# Altium PCB RDA5807_89C52.PcbDoc
Units mil, origin at the board's own origin, x right, y up, seen from the top; angles counter-clockwise.
Board outline 3937.01 x 3937.01 mil, 2 copper layers (Top Layer, Bottom Layer); 36 components, 32 nets, 157 pads, 16 vias.
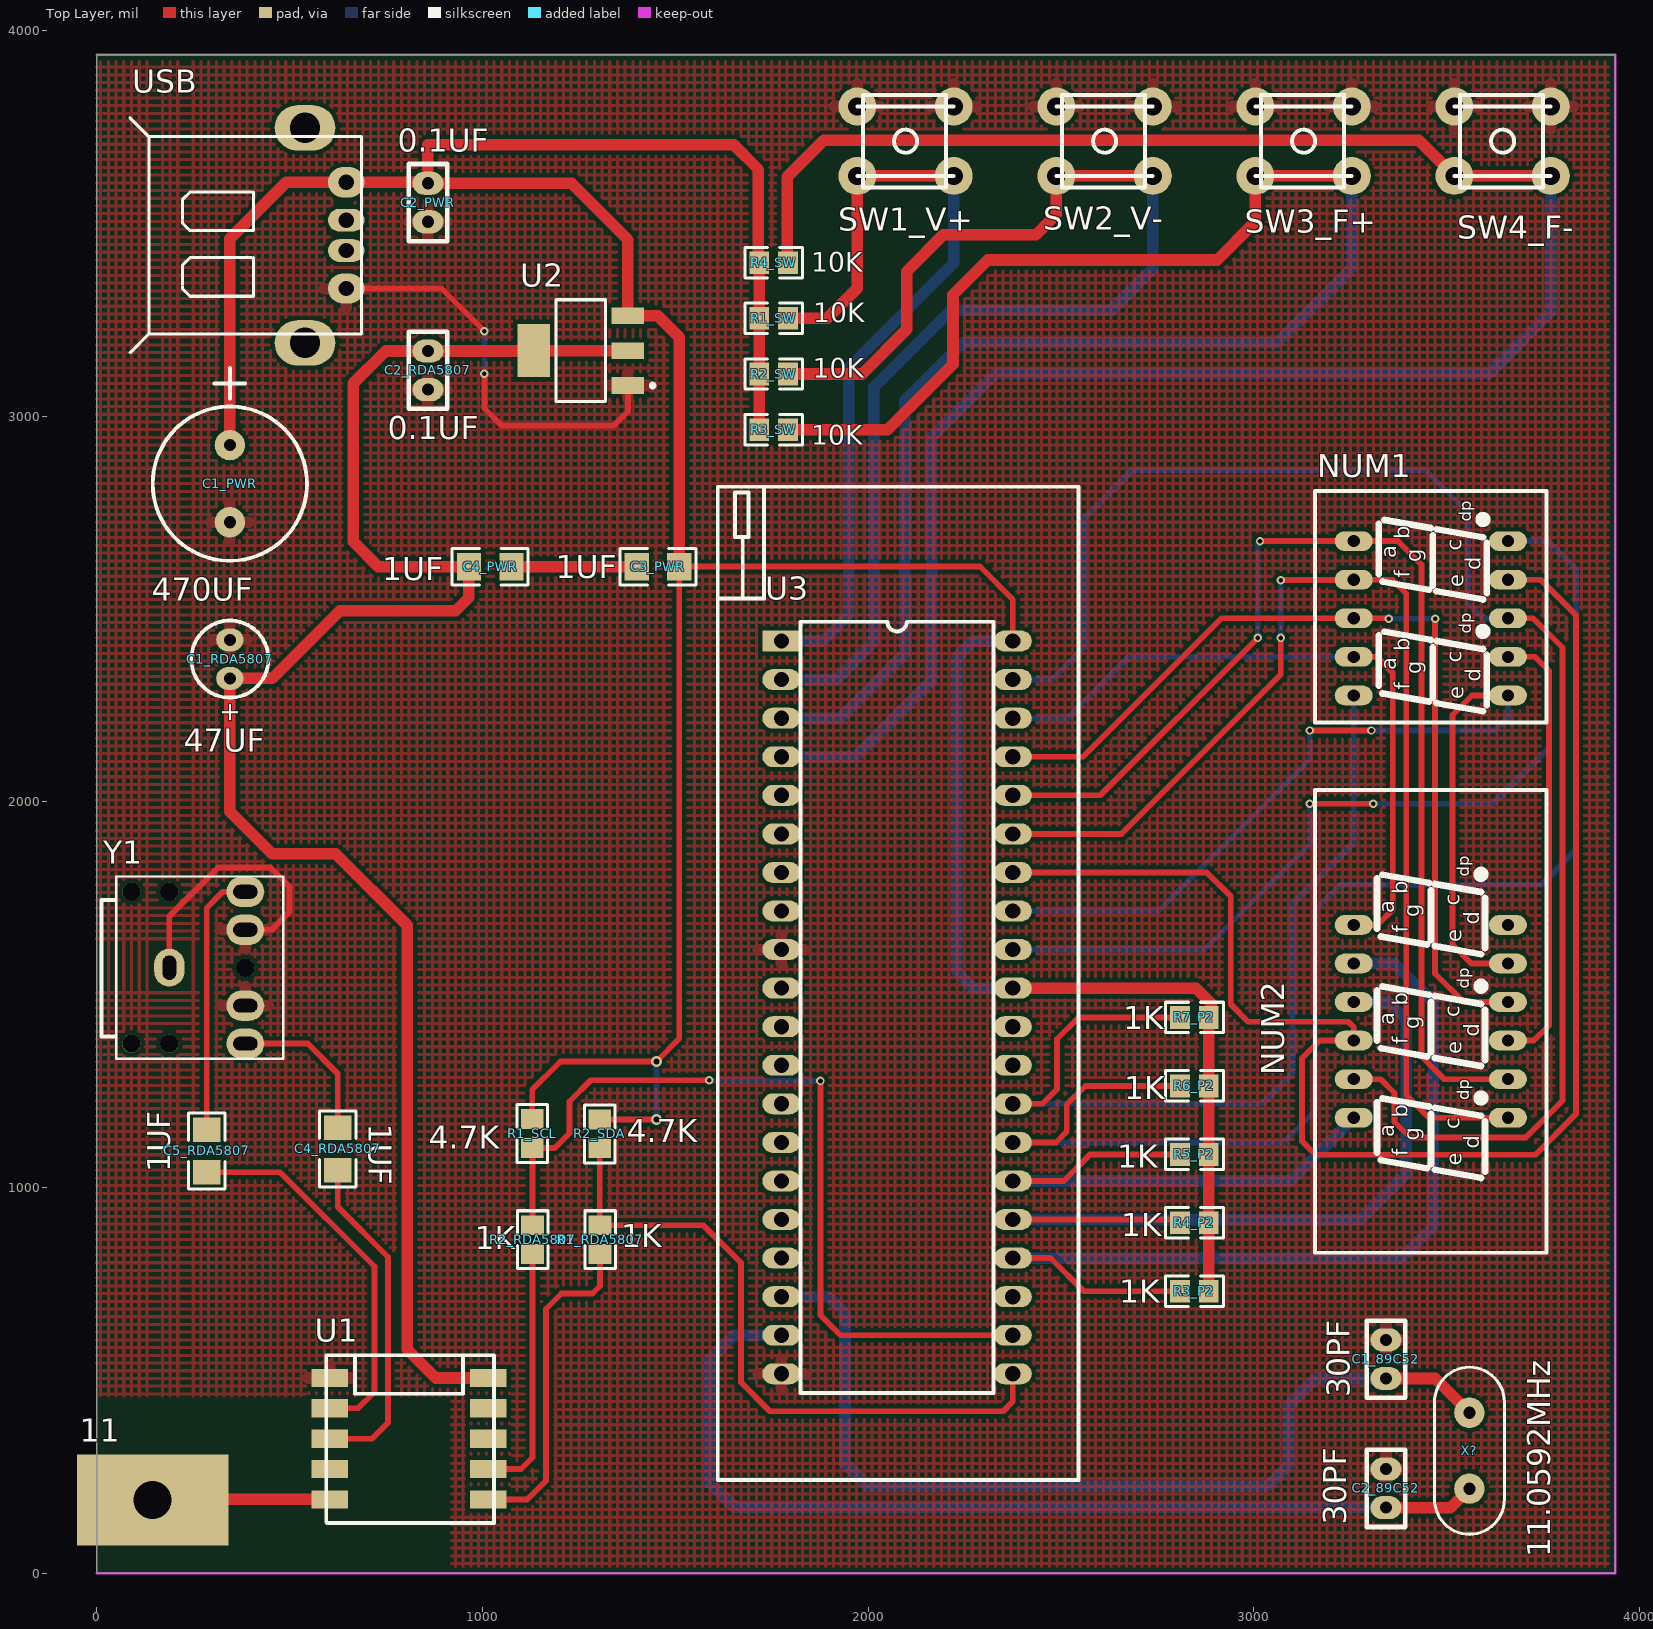
[diagram p0: Top Layer view]
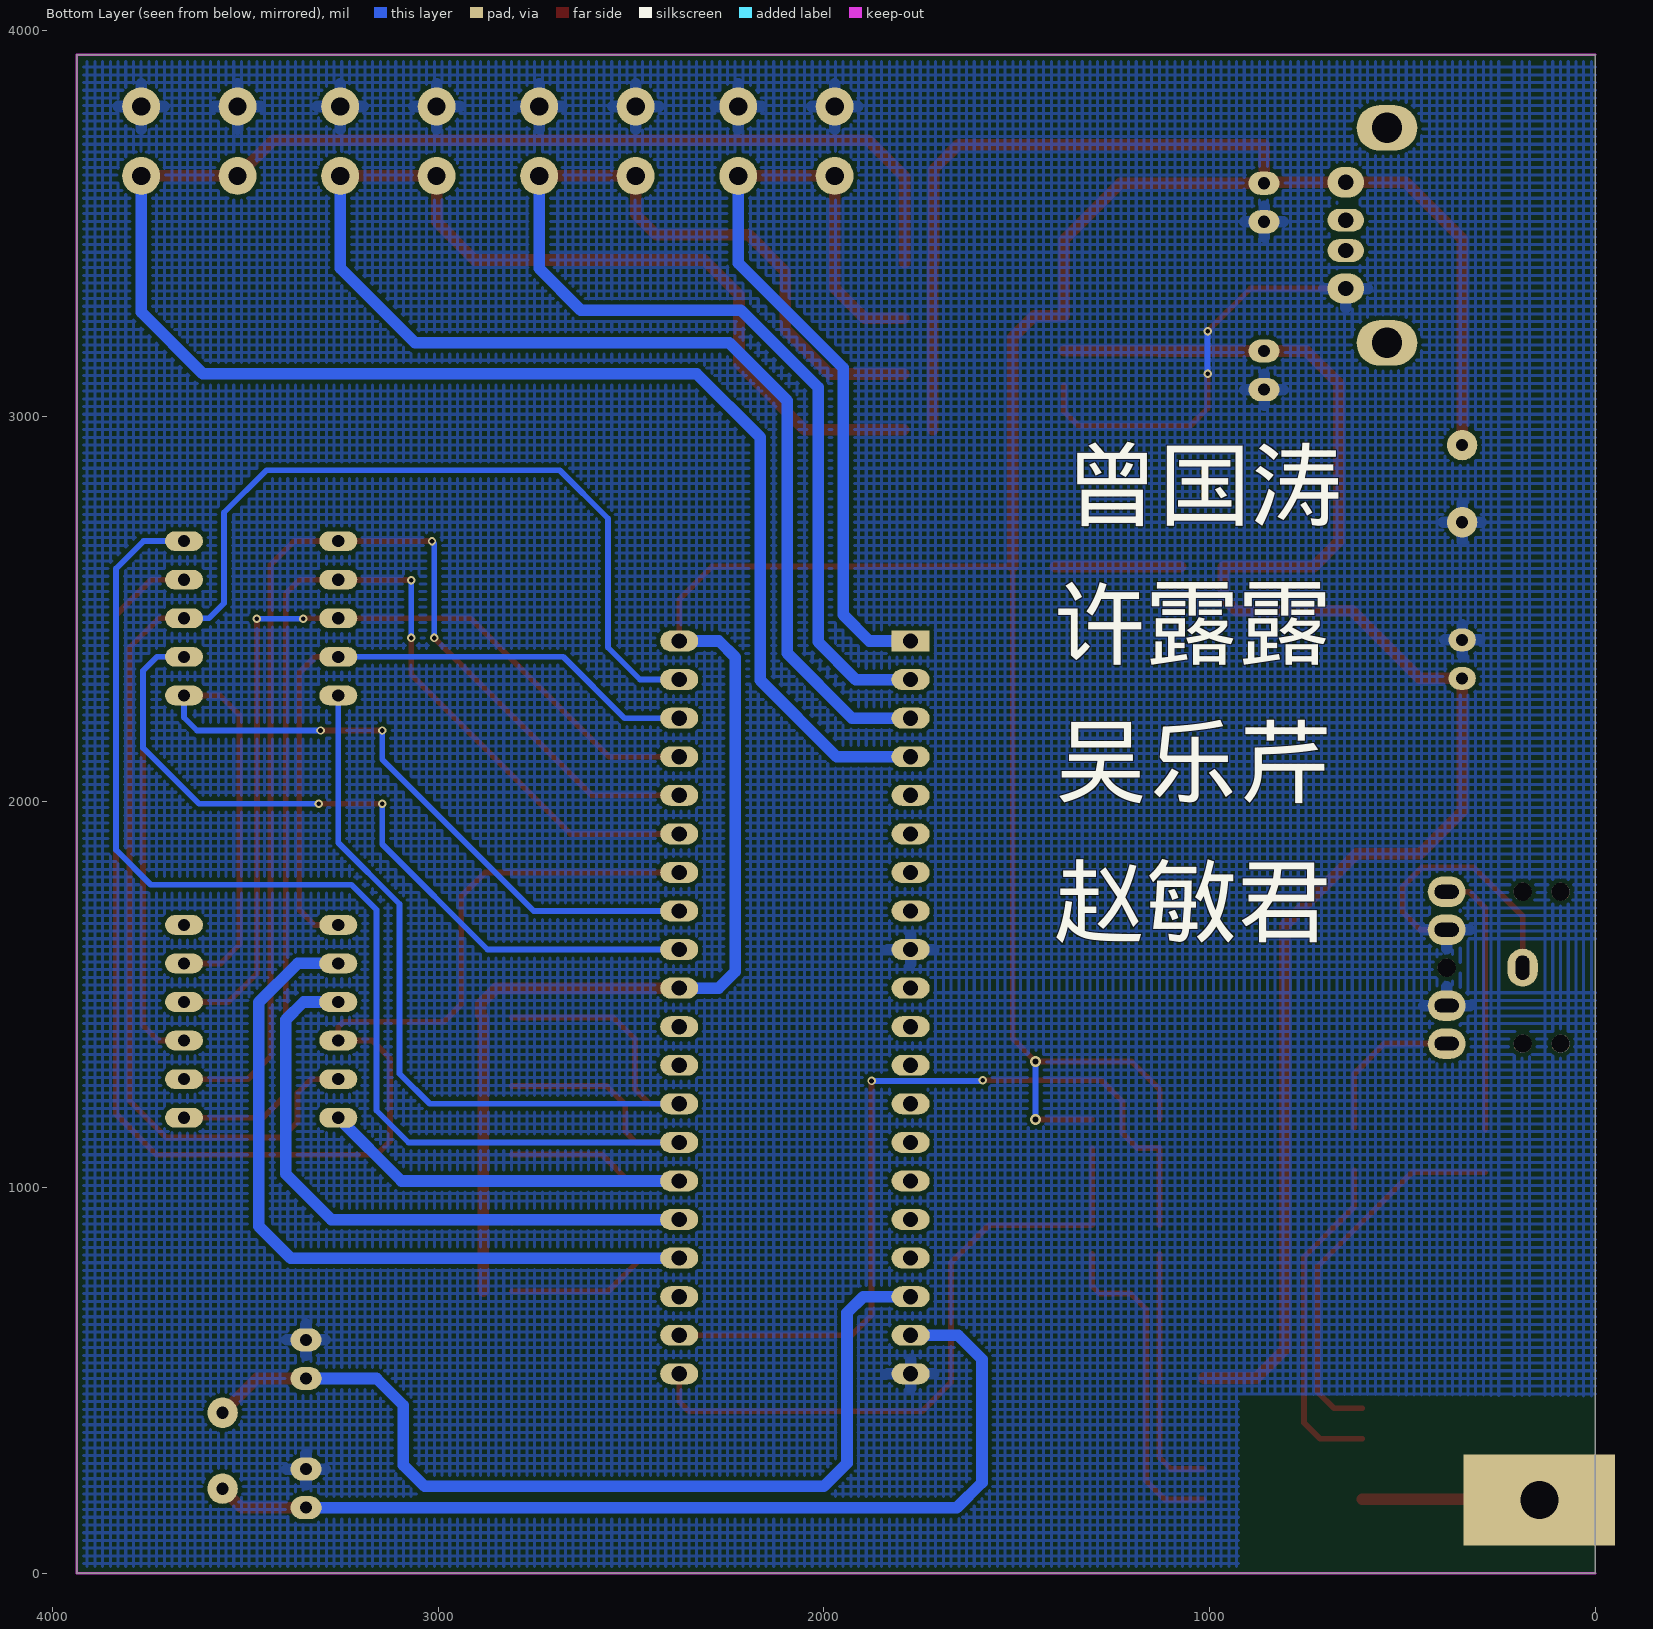
[diagram p1: Bottom Layer view, seen from below]
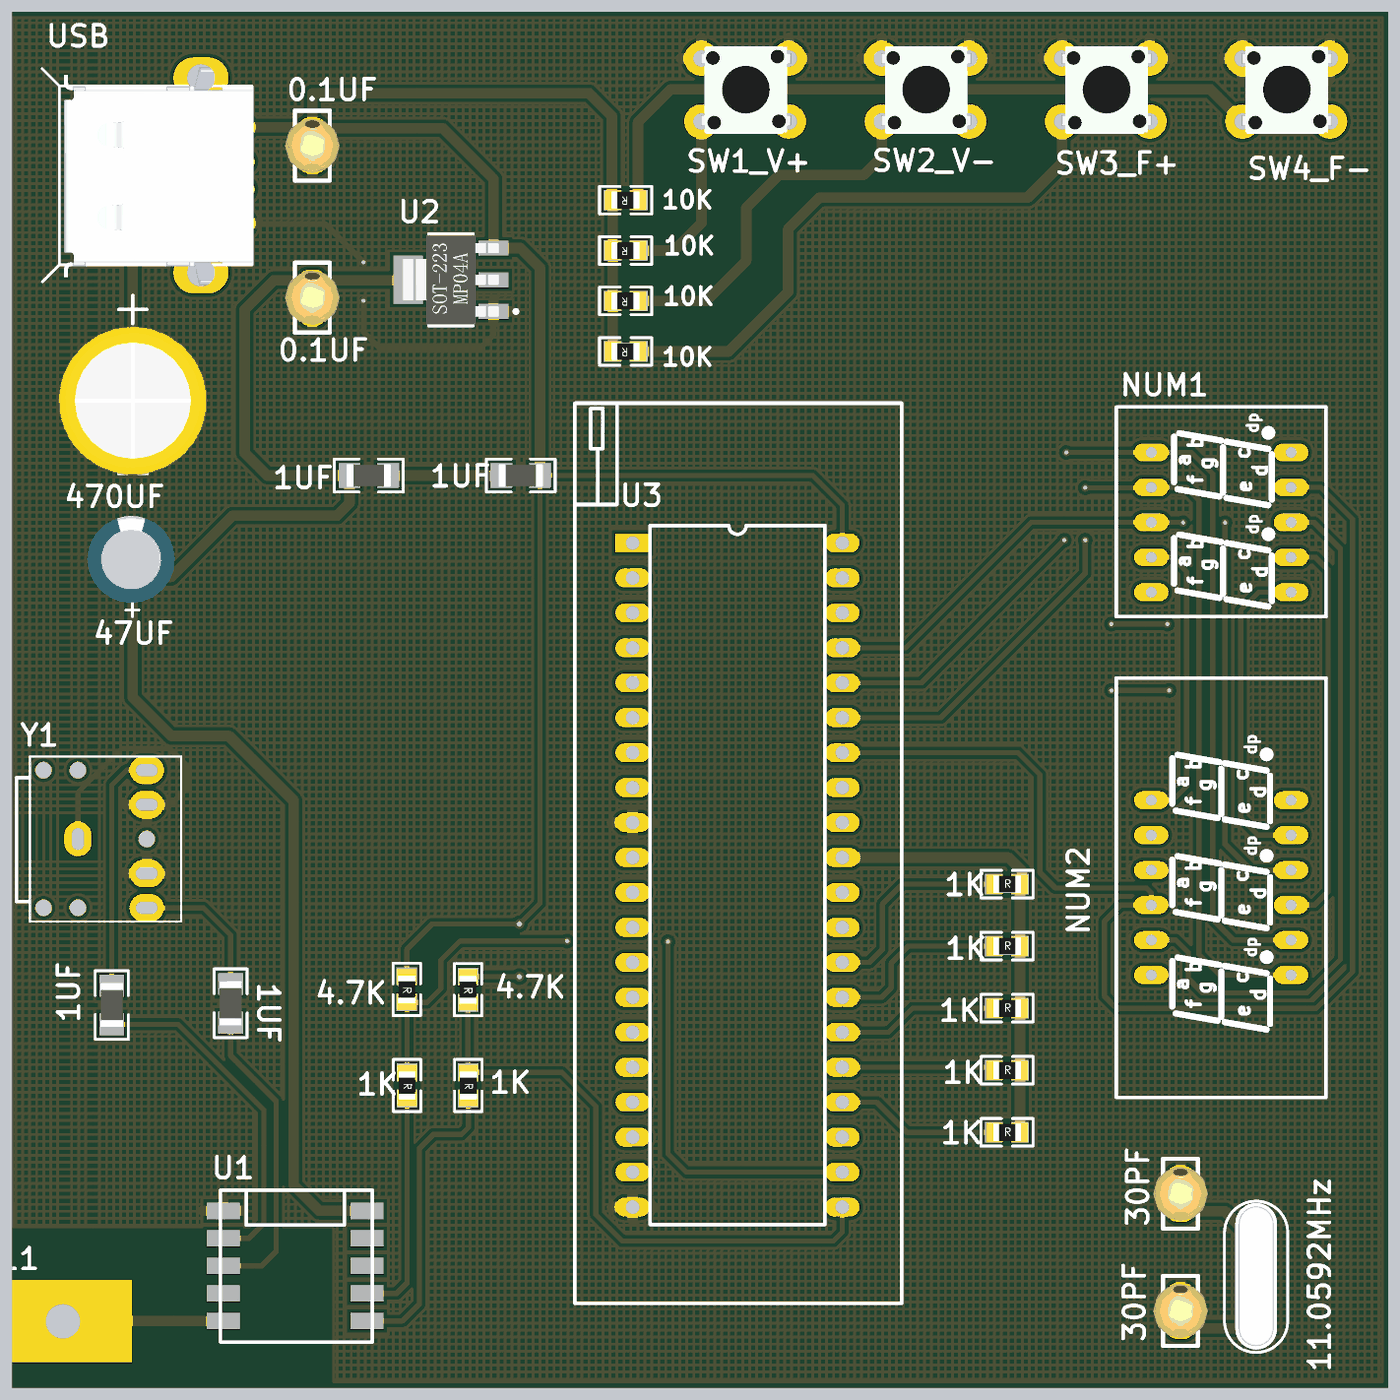
[diagram p2: 3D render of the assembled board from above, using the file's embedded part models]

## Layer stack, top to bottom
Top Solder: solder mask 0.4, Solder Resist, Dk 3.5
Top Layer: signal copper 1.4
Dielectric 1: dielectric 12.6, FR-4, Dk 4.8
Bottom Layer: signal copper 1.4
Bottom Solder: solder mask 0.4, Solder Resist, Dk 3.5

## Board outline
0,0 3937.01,0 3937.01,3937.01 0,3937.01

## Design rules (kind name [scope] priority, off if disabled: settings)
Clearance [(IsTrack) vs (IsTrack)] p1 off: gap=12
Clearance POLY [InPolygon] p2: gap=10
Clearance VIA-POLY [ISVIA vs InPolygon] p3: gap=6
Clearance all [All] p4: gap=6
DiffPairsRouting DiffPair_90DiffPairsRouting [InDifferentialPairClass('90OM')] p1: maxlimit=7 minlimit=7 mostfreqgap=7 toplayer_minwidth=6 toplayer_maxwidth=6 toplayer_prefwidth=6 bottomlayer_minwidth=6 bottomlayer_maxwidth=6 bottomlayer_prefwidth=6 maxuncoupledlength=500
MatchedLengths DiffPair_90MatchedLengths [InDifferentialPair ('D_D')] p1: tolerance=1000 checknetsindiffpair=FALSE checkdiffpairvsdiffpair=TRUE checkxsignals=TRUE checkothers=TRUE
PolygonConnect PolygonConnect_1 [ISVIA] p1: connectstyle=Direct reliefconductorwidth=10 reliefentries=4 polygonreliefangle="90 Angle" airgapwidth=10
PolygonConnect [All] p2: connectstyle=Relief reliefconductorwidth=30 reliefentries=4 polygonreliefangle="90 Angle" airgapwidth=10
RoutingVias [All] p1: holewidth=15 width=28 viastyle="Through Hole" minholewidth=12 minwidth=22 maxholewidth=15 maxwidth=28
SilkToSilkClearance [All] p1: silktosilkclearance=2
SilkToSolderMaskClearance [IsPad] p1: minsilkscreentomaskgap=2 clearancetoexposedcopper=TRUE
SolderMaskExpansion [All] p1: expansion=2.5
Width PWR [InNetClass('PWR')] p1: maxlimit=60 minlimit=6 preferedwidth=30
Width [All] p2: maxlimit=45 minlimit=6 preferedwidth=15
27 further rules are at their usual default settings.

## Classes and differential pairs
net class GND: GND
net class PWR: 3.3V 5V
component class RDA5807_89C52: 11 C1_89C52 C1_PWR C1_RDA5807 C2_89C52 C2_PWR C2_RDA5807 C3_PWR C4_PWR C4_RDA5807 C5_RDA5807 NUM1 NUM2 R1_RDA5807 R1_SCL R1_SW R2_RDA5807 R2_SDA R2_SW R3_P2 R3_SW R4_P2 R4_SW R5_P2 R6_P2 R7_P2 SW1_V+ SW2_V- SW3_F+ SW4_F- U1 U2 USB X?

## Components (designator, comment, footprint, x,y, rotation, side; value= is the part's Value field where it differs from the comment)
11 "天线贴片" 天线贴孔 145,190 r0 top
C1_89C52 "30PF" RAD-0.1 3344,556 r90 top
C1_PWR "470UF" RB.2/.4 345,2725 r90 top
C1_RDA5807 "47UF" RB.1/.2 345,2420 r270 top
C2_89C52 "30PF" RAD-0.1 3344,221 r90 top
C2_PWR "0.1UF" RAD-0.1 860,3555 r90 top
C2_RDA5807 "0.1UF" RAD-0.1 860,3120 r90 top
C3_PWR "1UF" 1206 1455,2610 r180 top
C4_PWR "1UF" 1206 1020,2610 r0 top
C4_RDA5807 "1UF" 1206 625,1100 r270 top
C5_RDA5807 "1UF" 1206 285,1095 r270 top
NUM1 "LEDNUM_2位7段数码管共阳极" LEDNUM_2位7段数码管 3259,2276 r90 top
NUM2 "频率" LEDNUM_3位7段数码管 3259,1181 r90 top
R1_RDA5807 "1K" "0805 RES" 1305,865 r270 top
R1_SCL "4.7K" "0805 RES" 1129,1140 r270 top
R1_SW "10K" "0805 RES" 1755,3253.67 r180 top
R2_RDA5807 "1K" "0805 RES" 1130,865 r270 top
R2_SDA "4.7K" "0805 RES" 1304,1139 r270 top
R2_SW "10K" "0805 RES" 1755,3109.33 r180 top
R3_P2 "1K" "0805 RES" 2846,731 r0 top
R3_SW "10K" "0805 RES" 1755,2965 r180 top
R4_P2 "1K" "0805 RES" 2846,908.5 r0 top
R4_SW "10K" "0805 RES" 1755,3398 r180 top
R5_P2 "1K" "0805 RES" 2846,1086 r0 top
R6_P2 "1K" "0805 RES" 2846,1263.5 r0 top
R7_P2 "1K" "0805 RES" 2846,1441 r0 top
SW1_V+ "6*6" 6*6按键开关 2222,3803 r270 top
SW2_V- "6*6_4脚按键开关" 6*6按键开关 2738,3803 r270 top
SW3_F+ "6*6_4脚按键开关" 6*6按键开关 3254,3803 r270 top
SW4_F- "6*6_4脚按键开关" 6*6按键开关 3770,3803 r270 top
U1 "RDA5807模块" RDA5807模块 1029.96,565.28 r180 top
U2 "AMS1117" SOT223 1255,3170 r90 top
U3 "STC89C52_Plug" ZIF40 1775,2417 r0 top
USB "USB母口" USB-A 646.69,3606.54 r180 top
X? "11.0592MHz" XTAL1 3559,219.15 r90 top
Y1 "音频插座" 耳机插座 483.43,1806.22 r180 top

## Footprints (in the part's own frame and the unit in brackets; to place one, negate y for a bottom-side part, rotate by r counter-clockwise, add the part's x,y. Pads: shape width x height; smd on the part's side, far side on the other; paste and mask are expansions set on the pad)
6*6按键开关 [mm]
  round 2.5 hole 1.2: 1(0,0) 1(0,-6.35) 2(4.572,0) 2(4.572,-6.35)
  silkscreen extent -0.76,-6.35 5.33,0, body extent -0.84,-6.4 5.36,0.15, height 5
"0805 RES" [mm]
  rect 1.3x1.5 smd: 1(-0.95,0) 2(0.95,0)
  silkscreen extent -1.9,-1 1.9,1, body extent -1.49,-0.7 1.51,0.7, height 0.53
1206 [mm]
  rect 1.6x1.8 smd: 1(-1.4,0) 2(1.4,0)
  silkscreen extent -2.5,-1.2 2.5,1.2, body extent -1.6,-0.81 1.6,0.81, height 0.61
LEDNUM_2位7段数码管 [mm]
  oval 1.3x2.5 hole 0.8: 1(0,-10.16) 2(2.54,-10.16) 3(5.08,-10.16) 4(7.62,-10.16) 5(10.16,-10.16) 6(10.16,0) 7(7.62,0) 8(5.08,0) 9(2.54,0) 10(0,0)
  silkscreen extent -1.78,-12.7 13.46,2.54
LEDNUM_3位7段数码管 [mm]
  oval 1.3x2.5 hole 0.8: 1(0,-10.16) 2(2.54,-10.16) 3(5.08,-10.16) 4(7.62,-10.16) 5(10.16,-10.16) 6(12.7,-10.16) 7(12.7,0) 8(10.16,0) 9(7.62,0) 10(5.08,0) 11(2.54,0) 12(0,0)
  silkscreen extent -8.89,-12.7 21.59,2.54
RAD-0.1 [mil]
  oval 60x80 hole 31.5: 1(-51.06,1.38) 2(48.94,1.38)
  silkscreen extent -101,-49 99,51, body extent -79,-77 77,80, height 291
RB.1/.2 [mm]
  oval 1.5x1.8 hole 0.8: 1(2.54,0) 2(0,0)
  silkscreen extent -1.27,-2.54 3.81,2.54, body extent -1.88,-3.26 4.42,3.04, height 11.5
RB.2/.4 [mm]
  round 2 hole 0.8: 1(5.08,0) 2(0,0)
  silkscreen extent -2.54,-5.08 10.16,5.08, body extent -2.89,-5.41 7.92,5.39, height 13
RDA5807模块 [mm]
  rect 2.4x1.2 smd mask+0.051: 1(10.82,1.5) 2(10.82,3.5) 3(10.82,5.5) 4(10.82,7.5) 5(10.82,9.5) 6(0.38,9.5) 7(0.38,7.5) 8(0.38,5.5) 9(0.38,3.5) 10(0.38,1.5)
  silkscreen extent 0,0 11.05,11.05
SOT223 [mm]
  rect 1.1x2.15 smd: 1(-2.3,-3.1) 2(0,-3.1) 3(2.3,-3.1)
  rect 3.5x2.15 smd: 2(0,3.1)
  silkscreen extent -3.35,-4.85 3.35,1.63, body extent -3.25,-3.48 3.25,3.48, height 1.7
USB-A [mm]
  oval 4x3 hole 2: 0(2.71,10.58) 0(2.71,-3.58)
  oval 2.4x2 hole 1: 1(0,0) 4(0,7)
  oval 2.4x1.5 hole 1: 2(0,2.5) 3(0,4.5)
  silkscreen extent -1,-4.25 14.25,11.23, body extent -1.04,-4.34 12.66,11.46, height 6.95
XTAL1 [mm]
  round 2 hole 0.8: 1(0,0) 2(5,0)
  silkscreen extent -3,-2.3 8,2.3, body extent -2.79,-1.52 7.87,1.52, height 3.09
ZIF40 [mm]
  rect 2.5x1.38 hole 1: 1(0,0)
  oval 2.5x1.38 hole 1: 2(0,-2.54) 3(0,-5.08) 4(0,-7.62) 5(0,-10.16) 6(0,-12.7) 7(0,-15.24) 8(0,-17.78) 9(0,-20.32) 10(0,-22.86) 11(0,-25.4) 12(0,-27.94) 13(0,-30.48) 14(0,-33.02) 15(0,-35.56) 16(0,-38.1) 17(0,-40.64) 18(0,-43.18) 19(0,-45.72) 20(0,-48.26) 21(15.24,-48.26) 22(15.24,-45.72) 23(15.24,-43.18) 24(15.24,-40.64) 25(15.24,-38.1) 26(15.24,-35.56) 27(15.24,-33.02) 28(15.24,-30.48) 29(15.24,-27.94) 30(15.24,-25.4) 31(15.24,-22.86) 32(15.24,-20.32) 33(15.24,-17.78) 34(15.24,-15.24) 35(15.24,-12.7) 36(15.24,-10.16) 37(15.24,-7.62) 38(15.24,-5.08) 39(15.24,-2.54) 40(15.24,0)
  silkscreen extent -4.19,-55.24 19.56,10.16
天线贴孔 [mm]
  rect 10x6 hole 2.5: 1(0,0)
耳机插座 [mm]
  round 1.2 hole 1.2: 0(2.5,6) 0(7.5,11) 0(7.5,1) 0(10,11) 0(10,1)
  oval 2x2.5 hole 1.6 slot 0.9 at 0 deg: 1(7.5,6)
  oval 2.5x2 hole 0.9 slot 1.6 at 0 deg: 2(2.5,1) 3(2.5,3.5) 4(2.5,8.5) 5(2.5,11)
  silkscreen extent 0,0 11.98,12

## Part data
C1_89C52 C2_89C52 C2_PWR C2_RDA5807: library part CAP_直插式电容_2.54
C1_PWR C1_RDA5807: library part CAP_直插式极性电容
C3_PWR C4_PWR C4_RDA5807 C5_RDA5807: library part CAP_1206贴片电容
NUM2: library part LEDNUM_3位7段数码管共阳极_5361
R1_RDA5807 R1_SCL R1_SW R2_RDA5807 R2_SDA R2_SW R3_P2 R3_SW R4_P2 R4_SW R5_P2 R6_P2 R7_P2: library part RES_贴片式电阻
SW1_V+: library part 6*6_4脚按键开关
U2: library part 贴片芯片_AMS1117_SOT223
U3: library part 直插芯片_STC89C52
X?: library part XTAL_直插式晶振_4.88MM

## Via types
v1: diameter 22, hole 12, Top Layer to Bottom Layer, tented both sides, 14 vias
v2: diameter 28, hole 15, Top Layer to Bottom Layer, tented both sides, 2 vias

## Nets (pads, with @x,y where several pads share a name; then routed paths per layer and width w, separated by ;. In a path a pad name is that pad's centre, name@x,y a point inside that pad or via, vN(x,y) a via of type N, cw(c..) or ccw(c..) an arc to the next point about the centre after c; other vN are vias at no path point)
3.3V: C1_RDA5807.1 C2_RDA5807.2 C4_PWR.1 U1.10 U2.2 | length 4538.8
  Top Layer w30: U1.10 878.78,506.22 805,580 805,1680 620,1865 455,1865 345,1975 C1_RDA5807.1 455,2320 630,2495 930,2495 964.88,2529.88 C4_PWR.1 730,2610 665,2675 665,3085 748.94,3168.94 C2_RDA5807.2 1131.89,3168.94 1132.95,3170 U2.2@1377.05,3170
5V: C1_PWR.1 C2_PWR.2 C3_PWR.1 R1_SCL.1 R1_SW.2 R2_SDA.1 R2_SW.2 R3_P2.2 R3_SW.2 R4_P2.2 R4_SW.2 R5_P2.2 R6_P2.2 R7_P2.2 U2.3 U3.31 U3.40 USB.1 | length 9760.1
  Top Layer w10: R2_SDA.1 R2_SDA.1@1305.6,1178
  Top Layer w15: C2_PWR.2@856.02,3606.54 C2_PWR.2 ; R1_SCL.1 1129,1254 1202,1327 v2(1451,1327) 1510.12,1386.12 C3_PWR.1 2290,2610 2375,2525 U3.40 ; R2_SDA.1 v2(1451,1176.4)
  Top Layer w30: C1_PWR.1 345,3460 491.54,3606.54 USB.1 C2_PWR.2@856.02,3606.54 ; C3_PWR.1 1510.12,3204.88 1454.45,3260.55 U2.3 1377.05,3457.95 1231.06,3603.94 C2_PWR.2 858.62,3703.62 1651.38,3703.62 1715.6,3639.4 R4_SW.2@1715.6,3398 ; R3_SW.2 R2_SW.2 R1_SW.2 R4_SW.2 ; U3.31 2850,1517 2890,1477 2890,1447.6 R7_P2.2 R6_P2.2 R5_P2.2 R4_P2.2 R3_P2.2
  Bottom Layer w15: v2(1451,1176.4) v2(1451,1327)
  Bottom Layer w30: U3.31 2273,1517 2230,1560 2230,2375 2272,2417 U3.40
A: NUM1.3 NUM2.11 U3.39 | length 4036.2
  Top Layer w15: NUM2.11 3329,1281 3365,1245 3365,1170 3405,1130 3705,1130 3800,1225 3800,2400 3724,2476 NUM1.3
  Bottom Layer w15: U3.39 2477,2317 2560,2400 2560,2735 2685,2860 3445,2860 3555,2750 3555,2515 3594,2476 NUM1.3
B: NUM1.9 NUM2.7 U3.38 | length 1800
  Top Layer w15: NUM2.7 3321,1681 3360,1720 3360,2335 3319,2376 NUM1.9
  Bottom Layer w15: U3.38 2517,2217 2676,2376 NUM1.9
C: NUM1.8 NUM2.4 U3.37 | length 2383.8
  Top Layer w15: U3.37 2557,2117 2916,2476 NUM1.8 3349,2476 v1(3350,2475) ; v1(3470,2475) 3470,1555 3544,1481 NUM2.4
  Bottom Layer w15: v1(3350,2475) v1(3470,2475)
D: NUM1.6 NUM2.2 U3.36 | length 3025.2
  Top Layer w15: U3.36 2602,2017 v1(3010,2425) ; v1(3016,2676) NUM1.6 3374,2676 3435,2615 3435,1340 3494,1281 NUM2.2
  Bottom Layer w15: v1(3010,2425) 3010,2670 v1(3016,2676)
DP: NUM1.2 NUM2.3 U3.32 | length 3152.1
  Top Layer w15: v1(3145,1995) v1(3310,1995) ; NUM2.3 3726,1381 3765,1420 3765,2340 3729,2376 NUM1.2
  Bottom Layer w15: U3.32 2872,1617 3145,1890 v1(3145,1995) ; v1(3310,1995) 3620,1995 3765,2140 3765,2340 3729,2376 NUM1.2
E: NUM1.7 NUM2.1 U3.35 | length 3039.8
  Top Layer w15: U3.35 2657,1917 3070,2330 v1(3070,2425) ; v1(3070,2575) 3258,2575 NUM1.7 3359,2576 3395,2540 3395,1240 3454,1181 NUM2.1
  Bottom Layer w15: v1(3070,2425) v1(3070,2575)
F: NUM1.4 NUM2.10 U3.34 | length 3893.9
  Top Layer w15: U3.34 2878,1817 2940,1755 2940,1475 2985,1430 3245,1430 3259,1416 NUM2.10 3171,1381 3125,1335 3125,1120 3160,1085 3730,1085 3835,1190 3835,2485 3744,2576 NUM1.4
F_1: NUM2.12 R5_P2.1 U3.26 | length 1414.1
  Top Layer w15: U3.26 2507,1017 2576,1086 R5_P2.1
  Bottom Layer w30: U3.26 3095,1017 NUM2.12
F_2: NUM2.9 R4_P2.1 U3.25 | length 2061.1
  Top Layer w15: U3.25 2800.1,917 R4_P2.1
  Bottom Layer w30: U3.25 3277,917 3395,1035 3395,1435 3349,1481 NUM2.9
F_3: NUM2.8 R3_P2.1 U3.24 | length 2421.4
  Top Layer w15: U3.24 2473,817 2559,731 R3_P2.1
  Bottom Layer w30: U3.24 3382,817 3465,900 3465,1480 3364,1581 NUM2.8
G: NUM1.1 NUM2.5 U3.33 | length 2517.3
  Top Layer w15: v1(3145,2185) v1(3305,2185) ; NUM2.5 3564,1581 3515,1630 3515,2225 3566,2276 NUM1.1
  Bottom Layer w15: U3.33 2752,1717 3145,2110 v1(3145,2185) ; v1(3305,2185) 3625,2185 3659,2219 NUM1.1
GND: C1_89C52.2 C1_PWR.2 C1_RDA5807.2 C2_89C52.2 C2_PWR.1 C2_RDA5807.1 SW1_V+.1 SW2_V-.1 SW3_F+.1 SW4_F-.1 U1.1 U2.1 U3.9 U3.20 USB.4 Y1.1 Y1.3 Y1.4 | length 1795.2
  Top Layer w15: Y1.1 188.15,1703.15 315,1830 450,1830 500,1780 500,1715 453.43,1668.43 Y1.3 ; USB.4 894.06,3330.94 v1(1005,3220) ; v1(1005,3110) 1005,3020 1050,2975 1340,2975 1377.05,3012.05 U2.1
  Bottom Layer w15: v1(1005,3110) v1(1005,3220)
Net11_1: 11.1 U1.5 | length 459.5
  Top Layer w6: 11.1 11.1@146.26,191.26
  Top Layer w30: 11.1@146.26,191.26 U1.5
NetC1_89C52_1: C1_89C52.1 U3.18 X?.2 | length 2459.8
  Top Layer w30: C1_89C52.1 3470.06,504.94 X?.2
  Bottom Layer w30: U3.18 1898,717 1940,675 1940,285 2000,225 3035,225 3090,280 3090,435 3159.94,504.94 C1_89C52.1
NetC2_89C52_1: C2_89C52.1 U3.19 X?.1 | length 2547
  Top Layer w30: C2_89C52.1 3509.79,169.94 X?.1
  Bottom Layer w30: U3.19 1652,617 1590,555 1590,235 1655.06,169.94 C2_89C52.1
NetC3_PWR_2: C3_PWR.2 C4_PWR.2 | length 324.8
  Top Layer w30: C4_PWR.2 C3_PWR.2
NetC4_RDA5807_1: C4_RDA5807.1 Y1.5 | length 412.3
  Top Layer w15: Y1.5 546.85,1373.15 625,1295 C4_RDA5807.1
NetC4_RDA5807_2: C4_RDA5807.2 U1.3 | length 876.8
  Top Layer w15: U1.3 713.74,348.74 755,390 755,820 625,950 C4_RDA5807.2
NetC5_RDA5807_1: C5_RDA5807.1 Y1.2 | length 692.2
  Top Layer w15: C5_RDA5807.1 285,1725 326.85,1766.85 Y1.2
NetC5_RDA5807_2: C5_RDA5807.2 U1.2 | length 995.1
  Top Layer w15: C5_RDA5807.2 475.12,1039.88 720,795 720,470 677.48,427.48 U1.2
NetR1_RDA5807_2: R1_RDA5807.2 U1.6 | length 862.6
  Top Layer w15: U1.6 1116.26,191.26 1165,240 1165,685 1205,725 1285,725 1305,745 R1_RDA5807.2
NetR2_RDA5807_2: R2_RDA5807.2 U1.7 | length 655
  Top Layer w15: U1.7 1100,270 1130,300 R2_RDA5807.2
P10_V+: R1_SW.1 SW1_V+.2 U3.1 | length 2206.9
  Top Layer w30: R1_SW.1 1893.67,3253.67 1972,3332 1972,3623 SW1_V+.2@2222,3623
  Bottom Layer w30: U3.1 1882,2417 1950,2485 1950,3125 2222,3397 SW1_V+.2@2222,3623
P11_V-: R2_SW.1 SW2_V-.2 U3.2 | length 3336
  Top Layer w30: R2_SW.1 1984.33,3109.33 2100,3225 2100,3375 2195,3470 2435,3470 2488,3523 2488,3623 SW2_V-.2@2738,3623
  Bottom Layer w30: U3.2 1917,2317 2015,2415 2015,3075 2215,3275 2630,3275 2738,3383 SW2_V-.2@2738,3623
P12_F+: R3_SW.1 SW3_F+.2 U3.3 | length 4494.4
  Top Layer w30: R3_SW.1 2050,2965 2220,3135 2220,3315 2310,3405 2905,3405 3004,3504 3004,3623 SW3_F+.2@3254,3623
  Bottom Layer w30: U3.3 1927,2217 2095,2385 2095,3040 2245,3190 3060,3190 3254,3384 SW3_F+.2@3254,3623
P13_F-: R4_SW.1 SW4_F-.2 U3.4 | length 5473.9
  Top Layer w30: R4_SW.1@1790.4,3398 1790.4,3620.4 1885,3715 3428,3715 3520,3623 SW4_F-.2@3770,3623
  Bottom Layer w30: U3.4 1967,2117 2165,2315 2165,2945 2330,3110 3610,3110 3770,3270 SW4_F-.2@3770,3623
SCL: R1_SCL.2 R2_RDA5807.1 U3.22 | length 2197.1
  Top Layer w15: R2_RDA5807.1 1130,1101.6 R1_SCL.2 1187.6,1102.6 1226,1141 1226,1223 1281,1278 v1(1588,1278) ; v1(1876.33,1276.33) 1876.33,668.67 1928,617 U3.22
  Bottom Layer w15: v1(1588,1278) 1589.67,1276.33 v1(1876.33,1276.33)
SDA: R1_RDA5807.1 R2_SDA.2 U3.21 | length 1733.4
  Top Layer w15: R2_SDA.2 1304,903.4 R1_RDA5807.1 1572.6,902.4 1670,805 1670,495 1745,420 2350,420 2375,445 U3.21
VOIDE_1: NUM1.10 R7_P2.1 U3.28 | length 2406.7
  Top Layer w15: U3.28 2452,1217 2490,1255 2490,1385 2546,1441 R7_P2.1
  Bottom Layer w15: U3.28 3022,1217 3100,1295 3100,1735 3259,1894 NUM1.10
VOIDE_2: NUM1.5 R6_P2.1 U3.27 | length 3549.3
  Top Layer w15: U3.27 2487,1117 2515,1145 2515,1215 2563.5,1263.5 R6_P2.1
  Bottom Layer w15: U3.27 3077,1117 3160,1200 3160,1720 3225,1785 3745,1785 3835,1875 3835,2605 3764,2676 NUM1.5
pads on no net: NUM2.6 U1.4 U1.8 U1.9 U3.5 U3.6 U3.7 U3.8 U3.10 U3.11 U3.12 U3.13 U3.14 U3.15 U3.16 U3.17 U3.23 U3.29 U3.30 USB.0 USB.2 USB.3 Y1.0

## Polygon pours and split planes (outlines as drawn)
GND on Top Layer "Top Layer-No Net" (hatched 90Degree grid 20 track 8, remove dead copper, pour order 8): 0,3937.01 0,530 5,525 5,490 5,475 5,460 915,460 920,455 920,0 3937.01,0 3937.01,3937.01
GND on Bottom Layer "Top Layer-No Net" (hatched 90Degree grid 20 track 8, remove dead copper, pour order 10): 0,460 0,3937.01 3930,3937.01 3930,17.01 3937.01,10 3927.01,0 925,0 925,455 915,465

## Keep-outs
Keep-Out Layer:
  lines w6: 0,0 3937.01,0 3937.01,3937.01 0,3937.01

## Silkscreen, mask and mechanical layers (free items; w line width, h text height)
Bottom Overlay:
  text "曾国涛" at 1371.95,2680 h300
  text "许露露" at 1403.89,2319.17 h300
  text "吴乐芹" at 1401.11,1961.11 h300
  text "赵敏君" at 1405,1600 h300

## Text inside footprints (layer, text, board x,y; h text height)
C1_RDA5807: Top Overlay "+" at 325,2260 h48 r270
NUM1: Top Overlay "dp" at 3564,2726 h31.5 r90; Top Overlay "c" at 3539,2651 h39.37 r90; Top Overlay "e" at 3544,2556 h39.37 r90; Top Overlay "d" at 3589,2601 h39.37 r90; Top Overlay "a" at 3369,2631 h39.37 r90; Top Overlay "g" at 3434,2621 h39.37 r90; Top Overlay "b" at 3404,2681 h39.37 r90; Top Overlay "f" at 3404,2581 h39.37 r90; Top Overlay "f" at 3404,2291 h39.37 r90; Top Overlay "b" at 3404,2391 h39.37 r90; Top Overlay "g" at 3434,2331 h39.37 r90; Top Overlay "a" at 3369,2341 h39.37 r90; Top Overlay "d" at 3589,2311 h39.37 r90; Top Overlay "e" at 3544,2266 h39.37 r90; Top Overlay "c" at 3539,2361 h39.37 r90; Top Overlay "dp" at 3564,2436 h31.5 r90
NUM2: Top Overlay "dp" at 3559,1806 h31.5 r90; Top Overlay "c" at 3534,1731 h39.37 r90; Top Overlay "e" at 3539,1636 h39.37 r90; Top Overlay "d" at 3584,1681 h39.37 r90; Top Overlay "a" at 3364,1711 h39.37 r90; Top Overlay "g" at 3429,1701 h39.37 r90; Top Overlay "b" at 3399,1761 h39.37 r90; Top Overlay "f" at 3399,1661 h39.37 r90; Top Overlay "dp" at 3559,1516 h31.5 r90; Top Overlay "c" at 3534,1441 h39.37 r90; Top Overlay "e" at 3539,1346 h39.37 r90; Top Overlay "d" at 3584,1391 h39.37 r90; Top Overlay "a" at 3364,1421 h39.37 r90; Top Overlay "g" at 3429,1411 h39.37 r90; Top Overlay "b" at 3399,1471 h39.37 r90; Top Overlay "f" at 3399,1371 h39.37 r90; Top Overlay "f" at 3399,1081 h39.37 r90; Top Overlay "b" at 3399,1181 h39.37 r90; Top Overlay "g" at 3429,1121 h39.37 r90; Top Overlay "a" at 3364,1131 h39.37 r90; Top Overlay "d" at 3584,1101 h39.37 r90; Top Overlay "e" at 3539,1056 h39.37 r90; Top Overlay "c" at 3534,1151 h39.37 r90; Top Overlay "dp" at 3559,1226 h31.5 r90